# Allegro board steppernug ose v1_1.brd
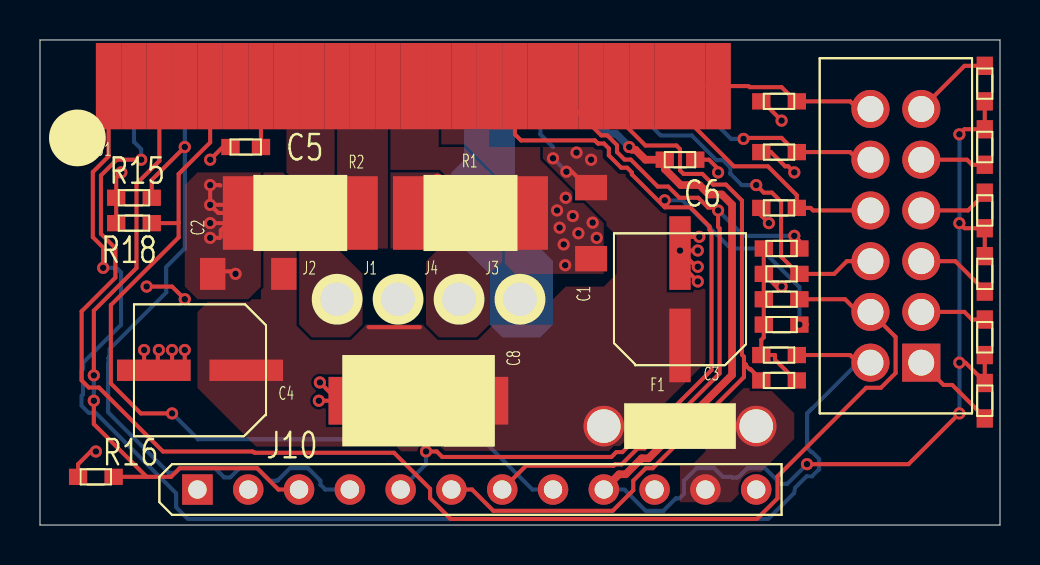
[diagram p0: board, top side]
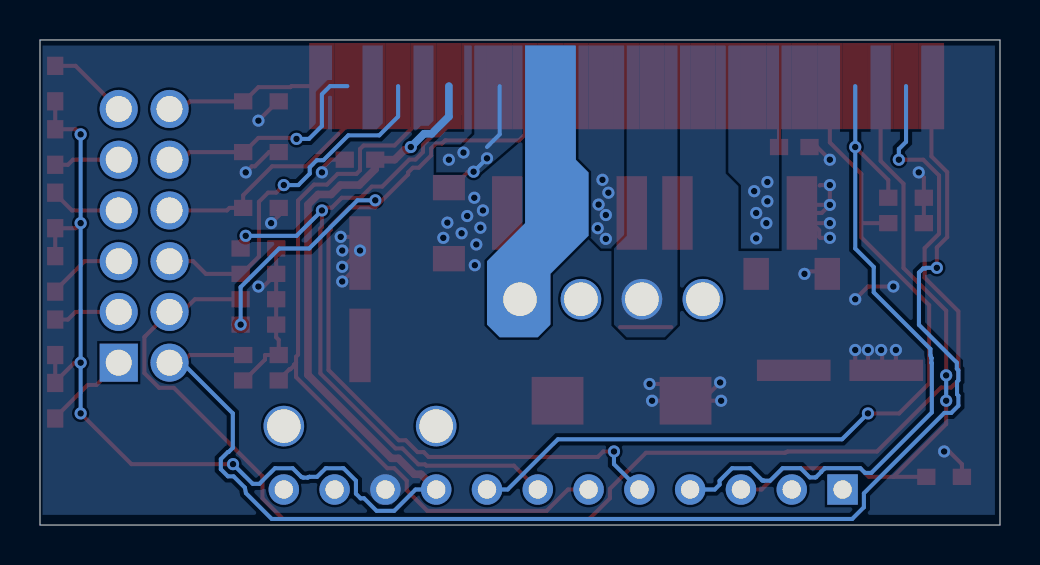
[diagram p1: board, bottom side, seen from below]

Outline 48.01 x 24.28 mm; copper layers: TOP, BOTTOM. Coordinates in mm from the lower left corner of the outline.
Outline path: 0,24.28 48.01,24.28 48.01,0 0,0 0,24.28

## Placement (name value [footprint] x y rotation side)
C1  4.7u  [SMD_1206_CAP]  27.56 15.11 90 top
C2  4.7u  [SMD_1206_CAP]  10.41 12.57 0 top
C3  47u  [SMD_ELECTRO6_3MM_CAP]  32 11.3 0 top
C4  47u  [SMD_ELECTRO6_3MM_CAP]  8 7.75 90 top
C5  330pf  [SMD_0603_CAP]  10.29 18.92 0 top
C6  2.2uf  [SMD_0603_CAP]  32 18.29 180 top
C8  47u  [D_CASE_TANT]  18.92 6.22 180 top
F1  FUSE  [THRU_FUSE]  32 4.95 0 top
J1  Wiremount  [WIRE_HOLE]  17.91 11.3 0 top
J2  Wiremount  [WIRE_HOLE]  14.86 11.3 0 top
J3  Wiremount  [WIRE_HOLE]  24 11.3 0 top
J4  Wiremount  [WIRE_HOLE]  20.95 11.3 0 top
J9  JUMPER6  [HEADER_6X2]  42.8 14.48 180 top
J10  HEADER 12  [SIP12]  7.87 1.78 90 top
R1  0.166  [SMD_2512_RES]  18.41 15.62 0 top
R2  0.166  [SMD_2512_RES]  16.13 15.62 180 top
R3  1k  [SMD_0603_RES]  47.24 15.75 90 top
R4  1k  [SMD_0603_RES]  47.24 6.22 270 top
R5  1k  [SMD_0603_RES]  47.24 9.4 90 top
R6  1k  [SMD_0603_RES]  47.24 12.57 270 top
R7  1k  [SMD_0603_RES]  47.24 18.92 270 top
R8  1k  [SMD_0603_RES]  47.24 22.1 90 top
R9  10k  [SMD_0603_RES]  37.08 12.57 0 top
R10  10k  [SMD_0603_RES]  36.96 15.88 0 top
R11  10k  [SMD_0603_RES]  36.96 8.51 0 top
R12  10k  [SMD_0603_RES]  36.96 21.21 0 top
R13  10k  [SMD_0603_RES]  37.08 11.3 0 top
R14  10k  [SMD_0603_RES]  36.96 18.67 0 top
R15  10k  [SMD_0603_RES]  4.7 16.38 0 top
R16  10k  [SMD_0603_RES]  2.79 2.41 0 top
R17  10k  [SMD_0603_RES]  37.08 10.03 0 top
R18  10k  [SMD_0603_RES]  4.7 15.11 0 top
R19  10k  [SMD_0603_RES]  37.08 13.84 0 top
R20  10k  [SMD_0603_RES]  36.96 7.24 180 top
U1  TB6560AHQ  [HZIP_25_SMT_NARROW_PADS]  3.43 21.97 0 top

## Library data of the parts
C1 C2 C5 C6 = C
C3 C4 C8 = C_elect_0
F1 = FUSE_0
J1-J4 = Wiremount
J9 = JUMPER6_0
J10 = HEADER 12: User Part Number: ***
R1-R20 = R
U1 = TB6560AHQ

## Footprints (pads in the part's own frame, mm; a bottom-side part is the same pattern mirrored in y, then rotated)
D_CASE_TANT
  rect 2.591x2.388 smd: 1(-3.2,0) 2(3.2,0)
HEADER_6X2
  rect 1.905x1.905 hole 1.295: 1(-1.27,6.35)
  round 1.905 hole 1.295: 2(-1.27,3.81) 3(-1.27,1.27) 4(-1.27,-1.27) 5(-1.27,-3.81) 6(-1.27,-6.35) 7(1.27,-6.35) 8(1.27,-3.81) 9(1.27,-1.27) 10(1.27,1.27) 11(1.27,3.81) 12(1.27,6.35)
HZIP_25_SMT_NARROW_PADS
  rect 1.27x4.318 smd: 1(0,0) 2(1.27,0) 3(2.54,0) 4(3.81,0) 5(5.08,0) 6(6.35,0) 7(7.62,0) 8(8.89,0) 9(10.16,0) 10(11.43,0) 11(12.7,0) 12(13.97,0) 13(15.24,0) 14(16.51,0) 15(17.78,0) 16(19.05,0) 17(20.32,0) 18(21.59,0) 19(22.86,0) 20(24.13,0) 21(25.4,0) 22(26.67,0) 23(27.94,0) 24(29.21,0) 25(30.48,0)
SIP12
  rect 1.524x1.524 hole 0.914: 1(0,0)
  round 1.524 hole 0.914: 2(0,-2.54) 3(0,-5.08) 4(0,-7.62) 5(0,-10.16) 6(0,-12.7) 7(0,-15.24) 8(0,-17.78) 9(0,-20.32) 10(0,-22.86) 11(0,-25.4) 12(0,-27.94)
SMD_0603_CAP
  rect 0.914x0.813 smd: 1(-0.762,0) 2(0.762,0)
SMD_0603_RES
  rect 0.914x0.813 smd: 1(-0.889,0) 2(0.889,0)
SMD_1206_CAP
  rect 1.27x1.6 smd: 1(-1.778,0) 2(1.778,0)
SMD_2512_RES
  rect 1.524x3.683 smd: 1(0,0) 2(6.223,0)
SMD_ELECTRO6_3MM_CAP
  rect 1.067x3.683 smd: 1(0,-2.311) 2(0,2.311)
THRU_FUSE
  round 2.032 hole 1.676: 1(-3.81,0) 2(3.81,0)
WIRE_HOLE
  round 2.032 hole 1.676: 1(0,0)

## Nets
VCC: C6.2 J10.9 R3.1 R4.1 R5.1 R6.1 R7.1 R8.1 U1.20(VDD)
0: C1.1 C2.1 C3.2(-) C4.2(-) C5.1 C6.1 C8.2(-) J10.10 R1.2 R2.2 R9.1 R10.1 R11.1 R12.1 R13.1 R14.1 R15.1 R16.1 R17.1 R18.1 R19.1 R20.1 U1.6(SGND) U1.10(MOTGND#10) U1.15(MOTGND#15)
VMOT: F1.2 J10.11
N35412: R2.1 U1.11(B_CRNT_SNS)
N35416: C1.2 C2.2 C3.1(+) C4.1(+) C8.1(+) F1.1 U1.8(VMB) U1.18(VMA)
N35480: J9.12 R11.2 U1.1(TQ2)
N35484: J9.7 R12.2 U1.25(DCY1)
N35516: J9.10 R9.2 U1.22(M2)
N35528: J9.9 R10.2 U1.23(M1)
N35582: J10.4 R15.2 U1.4(ENA)
N35586: J10.5 R17.2 U1.17(MO)
N35590: J10.6 R20.2 U1.21(DIR)
N35626: J10.8 R18.2 U1.5(RES)
N35750: J9.11 R13.2 U1.2(TQ1)
N35762: J9.8 R14.2 U1.24(DCY2)
N35970: J10.7 R19.2 U1.19(PROTECT)
N36018: J10.3 R16.2 U1.3(CLK)
N36066: J9.1 R4.2
N36070: J9.2 R5.2
N36074: J9.3 R6.2
N36078: J9.4 R3.2
N36082: J9.5 R7.2
N36086: J9.6 R8.2
N36164: R1.1 U1.14(A_CRNT_SNS)
N36250: J1.1(.) U1.12(OUT_BP)
N36264: J4.1(.) U1.13(OUT_AM)
N36268: J3.1(.) U1.16(OUT_AP)
N36272: J2.1(.) U1.9(OUT_BM)
N361566: C5.2 U1.7(OSC)

Pads without a net: J10 1 2 12

## Via types
v1: diameter 0.61, hole 0.33, TOP to BOTTOM, 72 vias

## Routing (per net, layer and track width the routed paths; a pad name or vN(x,y) marks a point on that pad's centre or on a via; arc(x,y) is an arc through that point)
VCC: length 72.4
  TOP w0.203: R8.1 R7.1 46.23,19.81 v1(45.97,19.56) ; R6.1 R3.1 46.23,14.86 v1(45.97,15.11) ; v1(45.97,8.13) 46.28,8.13 47.24,7.16 ; v1(38.35,3.05) 43.43,3.05 v1(45.97,5.59) ; R5.1 47.24,7.16 ; 47.24,7.16 R4.1 ; v1(29.46,18.92) 29.64,18.92
  TOP w0.381: J10.9 28.96,2.54 29.29,2.54 30.09,3.34 30.43,3.34 34.61,7.51 34.61,16.04 34.1,16.55 33.45,16.55 32.98,17.02 32.04,17.02 31.24,17.82 C6.2 30.27,18.29 29.77,18.79 29.6,18.79 v1(29.46,18.92)
  BOTTOM w0.203: v1(45.97,19.56) v1(45.97,15.11) v1(45.97,8.13) v1(45.97,5.59) ; J10.9 29.23,1.78 30.29,0.71 31.18,0.71 31.8,1.34 31.98,1.34 32.21,1.57 32.21,2.22 32.83,2.84 33.72,2.84 34.15,2.41 34.53,2.41 34.54,2.41 34.56,2.41 34.57,2.39 34.63,2.37 34.85,2.37 34.91,2.4 34.93,2.41 34.94,2.41 35.37,2.84 36.26,2.84 37.04,2.06 37.37,2.06 v1(38.35,3.05)
  BOTTOM w0.381: v1(29.46,18.92) 28.8,19.59 28.42,19.59 27.56,20.45 27.56,21.97
0: length 50
  TOP w0.203: v1(37.72,17.65) 37.41,17.96 37.26,17.96 36.55,18.67 R14.1 ; v1(8.51,15.11) 9.4,15.11 ; 9.4,15.11 9.04,14.76 9.04,14.43 8.99,14.38 v1(8.51,14.38) ; 9.4,15.11 R2.2 ; R2.2 8.92,15.62 v1(8.51,16.03) ; R2.2 9.5,16.03 v1(8.51,16.03) ; R11.1 36.07,9.27 36.2,9.4 R17.1 R13.1 R9.1 ; R11.1 36.02,8.51 ; R11.1 36.75,8.51 36.75,8.28 37.8,7.24 R20.1 ; 32,14.27 32,15.01 31.9,15.11 ; 32,14.27 32.16,14.43 v1(32.97,14.43) ; 32,14.27 v1(32,13.74) ; v1(5.33,11.94) 6.6,11.94 v1(7.24,11.3) ; C4.2 5.89,7.95 5.89,8.71 v1(5.94,8.76) ; C4.2 6.25,7.75 6.6,8.1 v1(6.6,8.76) ; C4.2 5.21,8.23 v1(5.21,8.76) ; R18.1 R15.1 3.81,17.4 v1(4.06,17.65) ; v1(8.51,16.03) v1(8.51,17.02) 8.99,17.02 9.02,16.99 ; v1(36.45,15.11) 36.07,15.49 R10.1 ; 32.82,12.93 v1(32,13.74) ; v1(32,13.74) v1(32.89,13.74) ; v1(32,13.74) C3.2 32,13.08 v1(32.89,12.19) ; R16.1 1.91,3.05 2.54,3.68 v1(2.79,3.68) ; C2.1 8.76,12.7 9.65,12.7 v1(9.78,12.57) ; R12.1 36.12,21.21 v1(37.08,20.24) ; C8.2 16.56,7.06 v1(17.53,7.06) ; C8.2 14.91,6.22 ; C8.2 v1(17.4,6.22) ; 14.91,6.22 v1(14,7.14) ; 14.91,6.22 v1(13.94,6.22) ; C5.1 9.14,18.92 v1(8.51,18.29) ; R19.1 R9.1 ; R9.1 36.83,11.94 v1(37.08,11.94) ; 7.29,7.95 7.24,8 v1(7.24,8.76) ; v1(33.91,17.65) 33.91,17.83 33.45,18.29 C6.1
  BOTTOM w0.203: 32.94,12.24 v1(32.89,12.19)
  vias: v1(25.86,15.75) v1(25.98,14.88) v1(26.19,14.05) v1(26.29,16.38) v1(26.26,13) v1(26.64,15.47) v1(26.92,14.61) v1(27.64,15.14) v1(27.84,14.38) v1(32.89,12.93)
N35416: length 8.4
  TOP w0.203: v1(26.32,17.69) 26.6,17.69 27.39,16.89 C1.2 ; 16.43,9.91 19,9.91 ; v1(11.68,15.11) 11.68,15.09
  BOTTOM w0.203: U1.18 25.02,19.56 25.65,18.92 ; v1(26.32,17.69) v1(25.65,18.36)
  vias: v1(11.63,17.17) v1(11.63,16.21) v1(12.19,15.62) v1(12.19,14.35) v1(12.29,16.71) v1(26.83,18.64) v1(27.56,18.29)
N35480: length 70.1
  TOP w0.203: R11.2 40.51,8.51 40.89,8.13 J9.12 ; U1.1 3.43,18.46 2.64,17.67 2.64,14.41 3.16,13.89 v1(3.16,12.88)
  BOTTOM w0.203: v1(3.16,12.88) 3.69,12.88 3.73,12.84 3.85,12.84 4.05,12.64 4.05,10.02 2.16,8.13 2.16,7.82 2.08,7.75 2.08,7.24 2.15,7.17 2.15,6.54 2.08,6.48 2.08,5.97 2.44,5.61 2.78,5.61 6.81,1.59 6.81,0.89 7.39,0.3 36.42,0.3 37.71,1.6 37.76,1.87 38.33,2.44 38.61,2.44 38.96,2.8 38.96,3.3 38.61,3.66 38.57,3.66 38.36,3.87 38.36,5.59 40.9,8.13 J9.12
N35484: length 8.1
  TOP w0.203: U1.25 35.43,21.97 35.48,21.92 37.08,21.92 37.8,21.21 R12.2 40.51,21.21 40.89,20.83 J9.7
N35516: length 18.3
  TOP w0.203: v1(35.81,17.02) 36.19,16.64 36.6,16.64 37.06,16.18 37.06,13.44 37.92,12.57 39.71,12.57 40.35,13.21 J9.10
  BOTTOM w0.203: U1.22 30.1,20.45 31.04,19.51 32.59,19.51 33.83,18.26 34.16,18.26 34.52,17.91 34.52,17.59 35.09,17.02 v1(35.81,17.02)
N35528: length 14
  TOP w0.203: J9.9 38.66,15.75 38.53,15.88 R10.2 37.85,16.51 36.4,17.96 34.7,17.96 32.21,20.45 31.37,20.45 U1.23
N35582: length 36
  TOP w0.203: R15.2 5.59,17.27 v1(7.24,18.92)
  BOTTOM w0.203: J10.4 14.27,1.78 14.02,2.02 14.02,2.22 13.4,2.84 12.5,2.84 11.9,2.25 11.89,2.23 11.84,2.23 11.81,2.22 11.5,2.22 10.87,2.84 9.97,2.84 9.51,2.38 9.22,2.38 9.21,2.4 9.2,2.4 8.94,2.66 8.94,2.67 8.77,2.84 8.76,2.84 8.75,2.84 6.99,2.84 6.75,2.61 6.45,2.61 6.43,2.62 3.41,5.64 3.41,8.09 3.43,8.13 3.43,8.35 3.43,8.36 3.43,8.37 3.47,8.45 3.48,8.53 3.48,8.81 6.31,11.65 6.31,12.92 7.24,13.84 v1(7.24,18.92) U1.4
N35586: length 51.3
  TOP w0.203: 31.24,15.91 29.6,17.55 29.6,17.65 29.36,17.89 29.06,17.89 28.45,18.5 28.45,18.85 28.2,19.1 27.91,19.1 27.9,19.1 27.89,19.11 27.88,19.12 27.75,19.25 27.71,19.25 24.05,19.25 23.75,19.56 U1.17 ; 31.24,15.91 32.52,15.91 33.48,14.95 33.48,14.78 33.58,14.68 33.58,7.76 30.06,4.24 29.71,4.24 29.12,3.65 28.82,3.65 28.58,3.41 20.11,3.41 19.84,3.68 v1(19.3,3.68) ; 31.24,15.91 v1(31.24,16.25) ; v1(37.97,10.03) 38.35,10.03
  BOTTOM w0.203: v1(37.97,10.03) 37.97,11.91 36.04,13.84 34.54,13.84 32.13,16.25 v1(31.24,16.25) ; v1(19.3,3.68) 19.3,3.05 J10.5
N35590: length 38.4
  TOP w0.203: R20.2 36.07,7.26 35.53,7.8 35.48,7.8 35.31,7.98 35.31,8.02 35.2,8.13 ; J10.6 21.61,1.78 22.67,0.71 28.64,0.71 29.67,1.74 29.67,2.22 30.29,2.84 30.64,2.84 35.2,7.41 35.2,8.13 ; 35.2,8.13 35.2,8.42 35.1,8.52 35.1,16.24 34.3,17.04 33.66,17.04 33.12,17.58 32.18,17.58 32,17.76 32,18.82 31.83,19 30.28,19 28.83,20.45 U1.21
N35626: length 42.6
  TOP w0.203: 6.93,15.15 6.9,15.11 R18.2 ; 6.93,15.15 6.93,14.4 3.54,11.01 3.54,7.09 5.04,5.59 v1(6.6,5.59) ; 6.93,15.15 6.93,17.58 8.51,19.15 U1.5
  BOTTOM w0.203: v1(6.6,5.59) 7.9,4.29 22.11,4.29 24.62,1.78 J10.8
N35750: length 72.3
  TOP w0.203: v1(5.06,18.29) 3.84,18.29 3.05,17.5 3.05,14.58 3.77,13.86 3.77,12.39 2.08,10.7 2.08,7.24 2.44,6.88 2.95,6.88 6.15,3.68 10.62,3.68 10.67,3.65 10.73,3.63 10.78,3.62 17.7,3.62 19.51,1.81 19.51,1.34 20.54,0.3 35.85,0.3 36.88,1.34 36.88,2.44 41.31,6.87 42.05,6.87 42.79,7.61 42.79,9.41 42.74,9.46 J9.11 40.89,10.67 40.26,11.3 37.97,11.3
  BOTTOM w0.203: v1(5.06,18.29) 5.06,18.82 4.7,19.18 U1.2
N35762: length 11.4
  TOP w0.203: v1(35.18,19.33) 35.23,19.38 37.08,19.38 37.8,18.67 R14.2 40.51,18.67 40.89,18.29 J9.8
  BOTTOM w0.203: v1(35.18,19.33) 34.55,19.33 33.91,19.98 33.91,21.56 33.5,21.97 U1.24
N35970: length 37.6
  TOP w0.203: 37.97,13.84 37.97,14.22 v1(37.72,14.48) ; U1.19 26.72,21.97 26.72,20.85 27.91,19.66 28.07,19.51 28.37,19.51 28.85,19.02 28.85,18.67 29.23,18.29 29.54,18.29 30.89,16.94 31.42,16.94 31.98,16.38 32.92,16.38 33.41,15.89 33.77,15.89 v1(33.91,15.75) 33.91,14.92 33.99,14.85 33.99,7.59 30.23,3.84 29.88,3.84 29.08,3.04 28.75,3.04 28.69,2.97 24.31,2.97 J10.7
  BOTTOM w0.203: v1(37.72,14.48) 35.18,14.48 v1(33.91,15.75)
N36018: length 31.9
  TOP w0.203: 5.33,2.41 6.55,2.41 6.99,2.84 10.86,2.84 11.92,1.78 J10.3 ; 5.33,2.41 R16.2 ; 5.33,2.41 2.69,5.06 v1(2.69,6.22) ; v1(2.69,7.49) 2.69,10.73 4.83,12.87 4.83,17.08 5.97,18.23 U1.3
  BOTTOM w0.203: v1(2.69,7.49) v1(2.69,6.22)
N36066: length 4.4
  TOP w0.203: R4.2 47.24,5.38 45.62,7.01 45.18,7.01 J9.1
N36070: length 3.3
  TOP w0.203: 47.24,10.29 46.61,10.29 46.23,10.67 J9.2
N36074: length 3.8
  TOP w0.203: R6.2 47.24,11.73 45.77,13.21 J9.3
N36078: length 3.6
  TOP w0.203: R3.2 47.24,16.59 46.41,15.75 J9.4
N36082: length 3.3
  TOP w0.203: R7.2 46.61,18.03 46.35,18.29 J9.5
N36086: length 4.1
  TOP w0.203: J9.6 46.23,22.99 R8.2
N36164:
  vias: v1(19.58,16.64) v1(19.71,15.52) v1(19.71,14.33) v1(19.88,17.28) v1(20.07,16.04) v1(20.12,14.86)
N361566: length 3
  TOP w0.203: 11.05,18.92 U1.7

## Copper pours and planes (outline as drawn; the poured copper is in the pictures)
0 on TOP: 7.87,11.3 10.41,11.3 11.05,11.94 11.05,17.65 7.87,17.65 7.24,17.02 7.24,11.94
0 on TOP: 19.94,24 19.94,18.92 21.21,18.92 23.11,17.02 23.11,13.21 23.75,12.57 28.19,12.57 28.19,15.11 25.02,18.29 25.02,18.92 22.48,18.92 22.48,24
0 on BOTTOM: 0.25,24 0.25,0.51 47.88,0.51 47.88,24
VMOT on TOP: 32,1.14 34.54,1.14 37.72,4.32 37.72,5.59 36.45,6.86 35.18,6.86 33.27,4.95 33.27,3.68 32.64,3.05 32,3.05
N35412 on TOP: 17.4,13.84 17.4,24 14.86,24 14.86,13.84
N35416 on TOP: 11.05,3.68 7.87,6.86 7.87,10.67 8.51,11.3 11.05,11.3 11.05,17.65 12.32,17.65 12.95,17.02 12.95,11.3 14.22,10.03 25.65,10.03 25.65,11.3 26.29,11.94 28.19,11.94 28.83,12.57 28.83,14.48 24.38,18.92 28.19,18.92 29.46,17.65 31.37,17.65 33.91,15.11 33.91,8.76 28.83,3.68
N35416 on BOTTOM: 23.75,24 26.29,24 26.29,19.56 26.92,18.92 28.19,18.92 28.19,17.65 25.97,17.65 23.75,19.56
N35416 on BOTTOM: 11.05,24 13.59,24 13.59,17.65 12.95,17.02 12.95,13.84 11.05,13.84
N36164 on TOP: 17.4,13.84 19.94,13.84 20.57,14.48 20.57,17.02 19.94,17.65 17.4,17.65
N36164 on BOTTOM: 18.67,24 21.21,24 21.21,18.29 20.57,17.65 20.57,14.48 19.94,13.84 18.67,13.84
N36250 on BOTTOM: 16.13,24 16.13,10.03 16.76,9.4 18.67,9.4 19.3,10.03 19.3,13.84 18.67,14.48 18.67,24
N36264 on TOP: 19.3,13.21 19.3,10.03 19.94,9.4 21.84,9.4 22.48,10.03 22.48,12.57 23.11,13.21 23.11,17.02 21.21,18.92 19.94,18.92 19.94,24 17.4,24 17.4,17.65 20.57,14.48
N36268 on BOTTOM (solid shape): 23.75,15.11 25.65,13.21 25.65,10.03 25.02,9.4 23.11,9.4 22.48,10.03 22.48,12.57 20.57,14.48 20.57,17.65 21.21,18.29 21.21,24 23.75,24
N36272 on TOP: 14.86,24 12.32,24 12.32,17.65 12.95,17.02 12.95,10.03 13.59,9.4 15.49,9.4 16.13,10.03 16.13,12.57 14.86,13.84
